# Altium PCB PCB2.PcbDoc
Units mil, origin at the board's own origin, x right, y up, seen from the top; angles counter-clockwise.
Board outline 6000 x 4000 mil, 2 copper layers (Top Layer, Bottom Layer); 22 components, 0 nets, 76 pads, 16 vias.
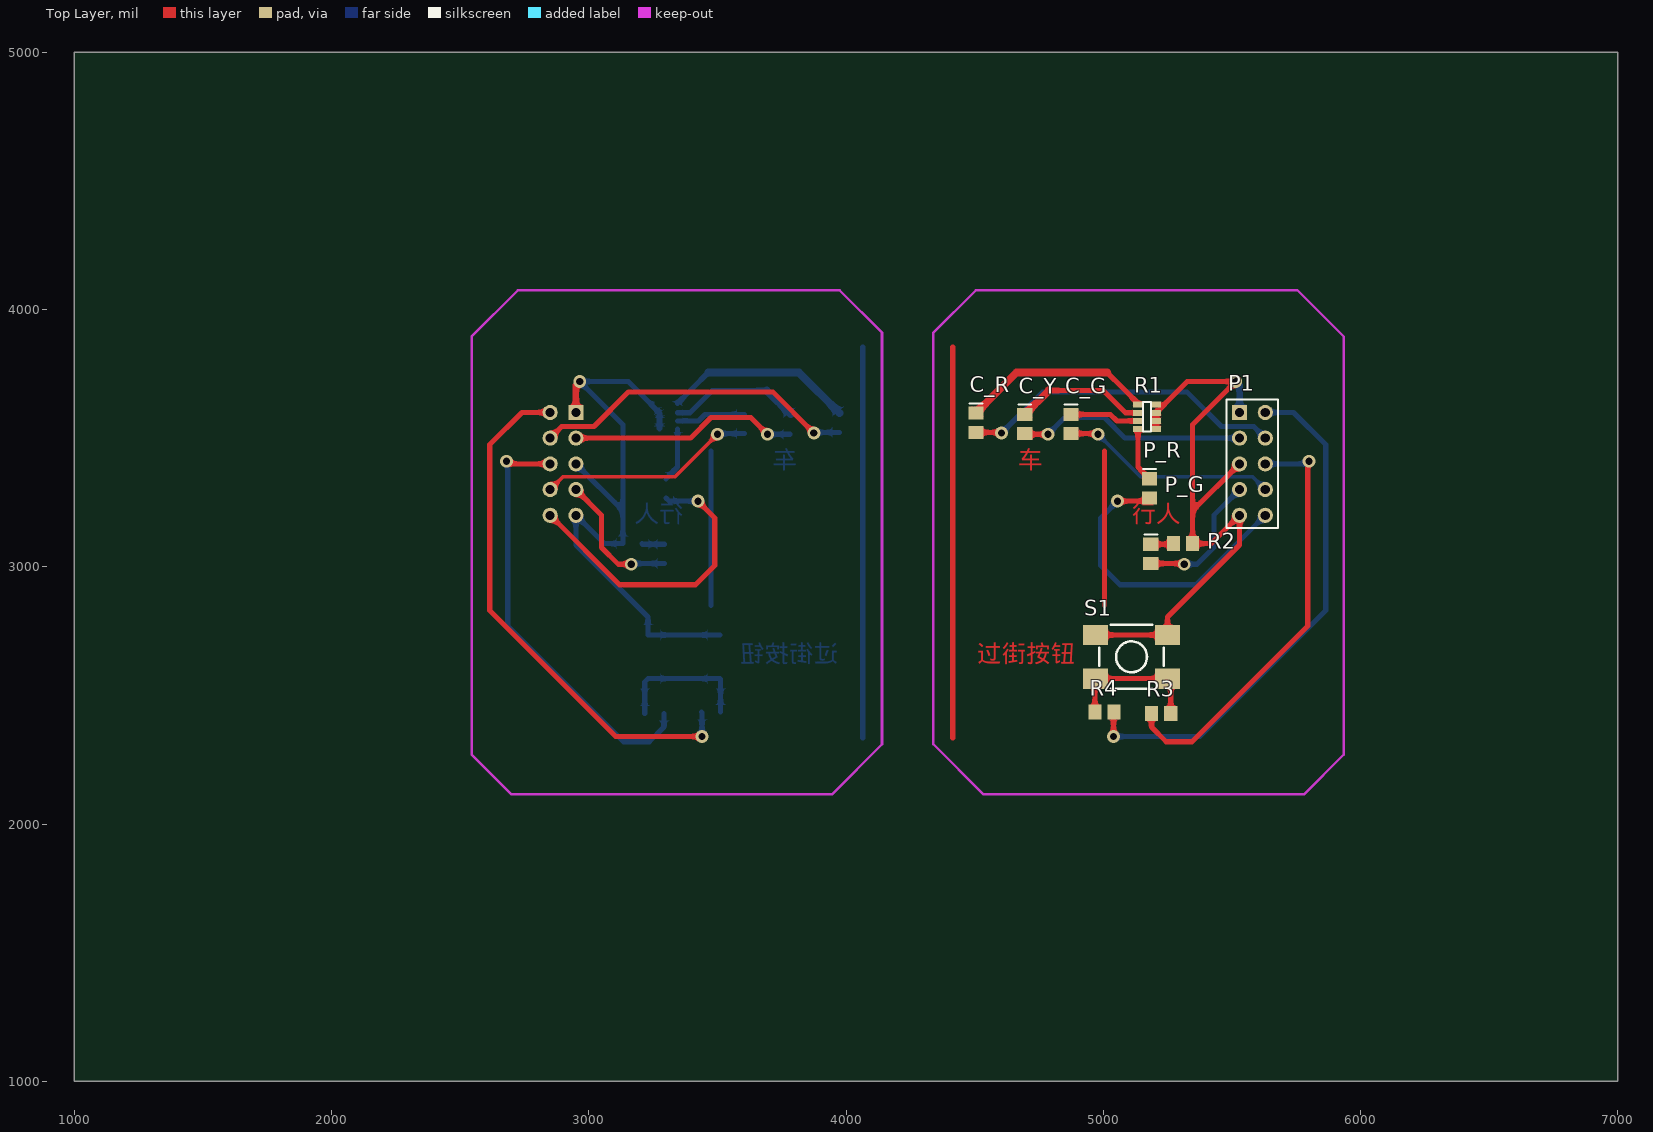
[diagram p0: Top Layer view]
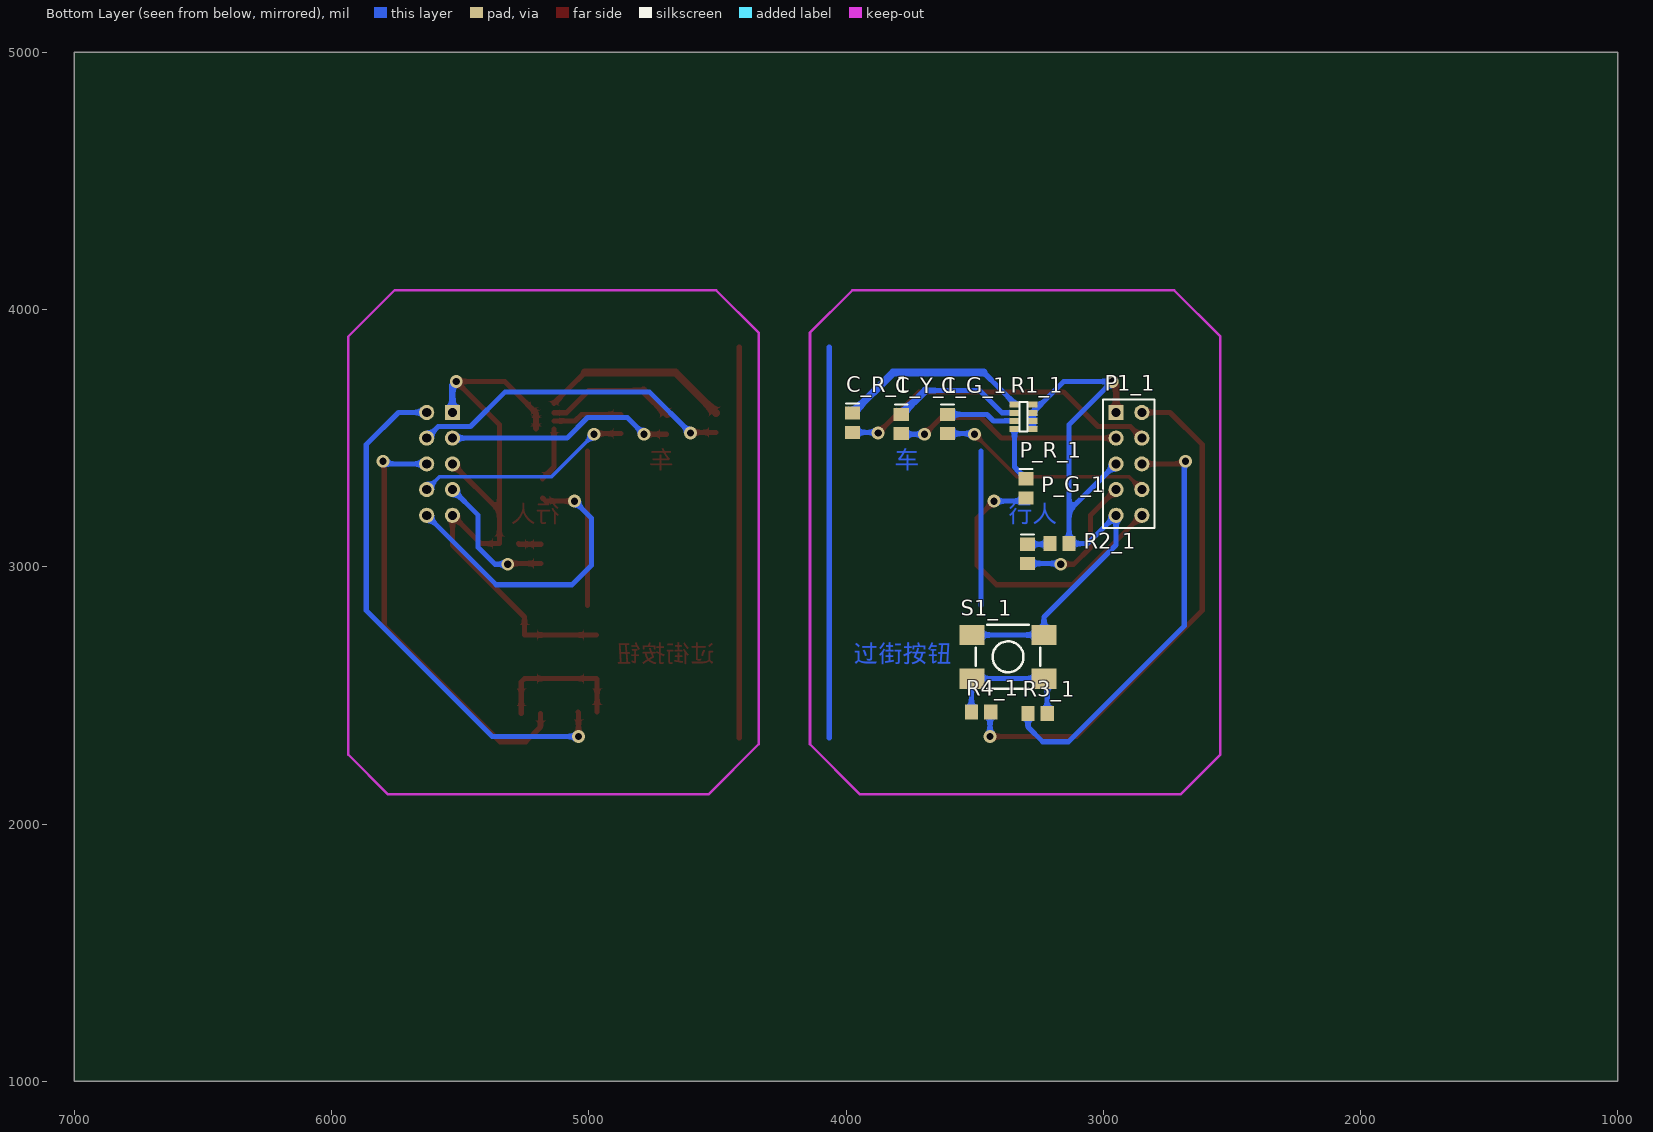
[diagram p1: Bottom Layer view, seen from below]

## Layer stack, top to bottom
Top Solder: solder mask 0.4, Solder Resist, Dk 3.5
Top Layer: signal copper 1.4
Dielectric 1: dielectric 12.6, FR-4, Dk 4.8
Bottom Layer: signal copper 1.4
Bottom Solder: solder mask 0.4, Solder Resist, Dk 3.5

## Board outline
1000,1000 7000,1000 7000,5000 1000,5000

## Design rules (kind name [scope] priority, off if disabled: settings)
Clearance [All] p1: gap=5
PolygonConnect [All] p1: connectstyle=Relief reliefconductorwidth=10 reliefentries=4 polygonreliefangle="90 Angle" airgapwidth=10
RoutingVias [All] p1: holewidth=28 width=50 viastyle="Through Hole" minholewidth=28 minwidth=50 maxholewidth=28 maxwidth=50
SolderMaskExpansion [All] p1: expansion=4
Width [All] p1: maxlimit=50 minlimit=10 preferedwidth=10 minimp=50.000000 maximp=50.000000 favimp=50.000000
30 further rules are at their usual default settings.

## Components (designator, comment, footprint, x,y, rotation, side; value= is the part's Value field where it differs from the comment)
C_G "LED0" LED_0805 4875,3555 r90 top
C_G_1 "LED0" LED_0805 3605,3555 r90 bottom (schematic designator C_G)
C_R "LED0" LED_0805 4505,3560 r90 top
C_R_1 "LED0" LED_0805 3975,3560 r90 bottom (schematic designator C_R)
C_Y "LED0" LED_0805 4695,3555 r90 top
C_Y_1 "LED0" LED_0805 3785,3555 r90 bottom (schematic designator C_Y)
P1 "Header 5X2" HDR5X2_A1 5530,3600 r270 top
P1_1 "Header 5X2" HDR5X2_A1 2950,3600 r270 bottom (schematic designator P1)
P_G "LED0" LED_0805 5185,3050 r90 top
P_G_1 "LED0" LED_0805 3295,3050 r90 bottom (schematic designator P_G)
P_R "LED0" LED_0805 5180,3305 r90 top
P_R_1 "LED0" LED_0805 3300,3305 r90 bottom (schematic designator P_R)
R1 "1K" 8P4R_0603 5135,3630 r0 top
R1_1 "1K" 8P4R_0603 3345,3630 r180 bottom (schematic designator R1)
R2 "Res1" 0805-2 5310,3090 r0 top
R2_1 "Res1" 0805-2 3170,3090 r180 bottom (schematic designator R2)
R3 "Res1" 0805-2 5225,2430 r0 top
R3_1 "Res1" 0805-2 3255,2430 r180 bottom (schematic designator R3)
R4 "Res1" 0805-2 5005,2435 r180 top
R4_1 "Res1" 0805-2 3475,2435 r0 bottom (schematic designator R4)
S1 "SW-PB4" SW_PB4_A1 5110,2650 r0 top
S1_1 "SW-PB4" SW_PB4_A1 3370,2650 r180 bottom (schematic designator S1)

## Footprints (in the part's own frame and the unit in brackets; to place one, negate y for a bottom-side part, rotate by r counter-clockwise, add the part's x,y. Pads: shape width x height; smd on the part's side, far side on the other; paste and mask are expansions set on the pad)
8P4R_0603 [mm]
  rect 1.016x0.6 smd: 1(0,0) 2(1.778,0) 3(0,-0.8) 4(1.778,-0.8) 5(0,-1.6) 6(1.778,-1.6) 7(0,-2.4) 8(1.778,-2.4)
  silkscreen extent 0.51,-2.67 1.27,0.25
0805-2 [mm] "贴片无丝印"
  rect 1.3x1.5 smd: 1(-0.95,0) 2(0.95,0)
HDR5X2_A1 [mm] "Connector; Header; 5x2 Position"
  rect 1.5x1.5 hole 0.9: 1(0,0)
  round 1.5 hole 0.9: 2(0,2.54) 3(2.54,0) 4(2.54,2.54) 5(5.08,0) 6(5.08,2.54) 7(7.62,0) 8(7.62,2.54) 9(10.16,0) 10(10.16,2.54)
  silkscreen extent -1.27,-1.27 11.43,3.81
LED_0805 [mm] "贴片二极管"
  rect 1.3x1.5 smd: 1(-0.95,0) 2(0.95,0)
  silkscreen extent 1.91,-0.63 1.91,0.64
SW_PB4_A1 [mil]
  rect 98.42x78.74 smd: 1(-140,85) 2(-140,-85) 3(140,-85) 4(140,85)
  silkscreen extent -125,-125 125,125, body extent -125,-125 125,125, height 236

## Part data
C_G C_G_1 C_R C_R_1 C_Y C_Y_1 P_G P_G_1 P_R P_R_1: "发光二极管"
P1 P1_1: "接插件"
R1 R1_1: library part res_8p4r
R2 R2_1 R3 R3_1 R4 R4_1: "贴片电阻"
S1 S1_1: "微动开关"

## Via types
v1: diameter 50, hole 28, Top Layer to Bottom Layer, 16 vias

## Nets (pads, with @x,y where several pads share a name; then routed paths per layer and width w, separated by ;. In a path a pad name is that pad's centre, name@x,y a point inside that pad or via, vN(x,y) a via of type N, cw(c..) or ccw(c..) an arc to the next point about the centre after c; other vN are vias at no path point)
pads on no net: C_G.1 C_G.2 C_G_1.1 C_G_1.2 C_R.1 C_R.2 C_R_1.1 C_R_1.2 C_Y.1 C_Y.2 C_Y_1.1 C_Y_1.2 P1.1 P1.2 P1.3 P1.4 P1.5 P1.6 P1.7 P1.8 P1.9 P1.10 P1_1.1 P1_1.2 P1_1.3 P1_1.4 P1_1.5 P1_1.6 P1_1.7 P1_1.8 P1_1.9 P1_1.10 P_G.1 P_G.2 P_G_1.1 P_G_1.2 P_R.1 P_R.2 P_R_1.1 P_R_1.2 R1.1 R1.2 R1.3 R1.4 R1.5 R1.6 R1.7 R1.8 R1_1.1 R1_1.2 R1_1.3 R1_1.4 R1_1.5 R1_1.6 R1_1.7 R1_1.8 R2.1 R2.2 R2_1.1 R2_1.2 R3.1 R3.2 R3_1.1 R3_1.2 R4.1 R4.2 R4_1.1 R4_1.2 S1.1 S1.2 S1.3 S1.4 S1_1.1 S1_1.2 S1_1.3 S1_1.4
copper on no net: | length 31139.7
  Top Layer w15: 2850,3300 2900,3350 3335,3350 v1(3500,3515)
  Top Layer w20: v1(2680,3410) 2690,3400 2850,3400 ; 2850,3200 3120,2930 3415,2930 3490,3005 3490,3190 v1(3425,3255) ; 2850,3500 2895,3545 3020,3545 3155,3680 3715,3680 v1(3875,3520) ; 2850,3600 2740,3600 2615,3475 2615,2830 3105,2340 v1(3440,2340) ; 2950,3300 3050,3200 3050,3075 3115,3010 v1(3165,3010) ; 2950,3500 3395,3500 3475,3580 3630,3580 v1(3695,3515) ; v1@2950,3705 v1(2965,3720) ; 4415,2335 4415,3855 ; 4505,3522.6 v1@4602.4,3522.6 ; 4697.6,3515 v1(4785,3515) ; 4787.6,3685 5000,3685 5086.5,3598.5 5135,3598.5 ; 4875,3517.6 4977.4,3517.6 v1(4980,3515) ; 4875,3592.4 5027.6,3592.4 5052.99,3567.01 5135,3567.01 ; 4967.6,2435 4967.6,2562.6 4970,2565 5250,2565 5262.4,2552.6 5262.4,2430 ; 4970,2735 5250,2735 5250,2805 5530,3085 5530,3200 5420,3090 5347.4,3090 5347.4,3217.4 ; 5005,2850 5005,3450 ; 5015.31,3755 5135,3635.32 ; v1(5040,2340) 5040,2432.6 5042.4,2435 ; v1(5055,3255) 5167.4,3255 5180,3267.6 ; 5135,3535.51 5135,3387.4 5180,3342.4 ; 5185,3012.6 5312.4,3012.6 v1(5315,3010) ; 5185,3087.4 5270,3087.4 5272.6,3090 ; 5187.6,2430 5187.6,2377.4 5245,2320 5345,2320 5795,2770 5795,3385 5800,3390 v1(5800,3410) ; 5205,3535.51 5205,3567.01 5205,3598.5 5326.5,3720 v1(5515,3720) 5347.4,3552.4 5347.4,3217.4 ; 5530,3400 5347.4,3217.4
  Top Layer w25: 2950,3600 v1@2950,3705
  Top Layer w30: 4505,3597.4 4662.6,3755 5015.31,3755 ; 4695,3592.4 4787.6,3685
  Bottom Layer w15: v1(4980,3515) 5145,3350 5580,3350 5630,3300
  Bottom Layer w20: v1(2680,3410) 2680,3390 2685,3385 2685,2770 3135,2320 3235,2320 3292.4,2377.4 3292.4,2430 ; 2950,3400 3132.6,3217.4 ; v1(3165,3010) 3167.6,3012.6 3295,3012.6 ; 3207.4,3090 3210,3087.4 3295,3087.4 ; 3217.6,2430 3217.6,2552.6 3230,2565 3510,2565 3512.4,2562.6 3512.4,2435 ; 3275,3535.51 3275,3567.01 3275,3598.5 3153.5,3720 v1(2965,3720) 3132.6,3552.4 3132.6,3217.4 ; 3300,3267.6 3312.6,3255 v1(3425,3255) ; 3300,3342.4 3345,3387.4 3345,3535.51 ; 3345,3567.01 3427.01,3567.01 3452.4,3592.4 3605,3592.4 ; 3345,3598.5 3393.5,3598.5 3480,3685 3692.4,3685 ; 3345,3635.32 3464.68,3755 ; 3437.6,2435 3440,2432.6 v1(3440,2340) ; 3475,2850 3475,3450 ; v1(3500,3515) 3502.6,3517.6 3605,3517.6 ; 3510,2735 3230,2735 3230,2805 2950,3085 2950,3200 3060,3090 3132.6,3090 3132.6,3217.4 ; v1(3695,3515) 3782.4,3515 ; v1@3877.6,3522.6 3975,3522.6 ; 4065,2335 4065,3855 ; v1(4605,3520) 4765,3680 5325,3680 5460,3545 5585,3545 5630,3500 ; v1(4785,3515) 4850,3580 5005,3580 5085,3500 5530,3500 ; v1(5040,2340) 5375,2340 5865,2830 5865,3475 5740,3600 5630,3600 ; v1(5055,3255) 4990,3190 4990,3005 5065,2930 5360,2930 5630,3200 ; v1(5315,3010) 5365,3010 5430,3075 5430,3200 5530,3300 ; v1(5515,3720) v1@5530,3705 ; 5630,3400 5790,3400 v1(5800,3410)
  Bottom Layer w25: 5530,3600 v1@5530,3705
  Bottom Layer w30: 3464.68,3755 3817.4,3755 3975,3597.4 ; 3692.4,3685 3785,3592.4

## Keep-outs
Keep-Out Layer:
  lines w10: 3460,2115 3945,2115 4140,2310 4140,3910 3975,4075 3940,4075 2725,4075 2545,3895 2545,2270 2700,2115 3470,2115 ; 5010,2115 5780,2115 5935,2270 5935,3895 5755,4075 4540,4075 4505,4075 4340,3910 4340,2310 4535,2115 5020,2115

## Other copper
Top Layer:
  text "车" at 4670,3360 h120
  text "行人" at 5110,3150 h120
  text "过街按钮" at 4510,2605 h120
Bottom Layer:
  text "车" at 3810,3360 h120
  text "行人" at 3370,3150 h120
  text "过街按钮" at 3970,2605 h120